# Altium PCB Smart_Restaurant.PcbDoc
Units mm, origin at the board's own origin, x right, y up, seen from the top; angles counter-clockwise.
Board outline 169.54 x 138.05 mm, 2 copper layers (Top Layer, Bottom Layer); 20 components, 32 nets, 110 pads, 0 vias.
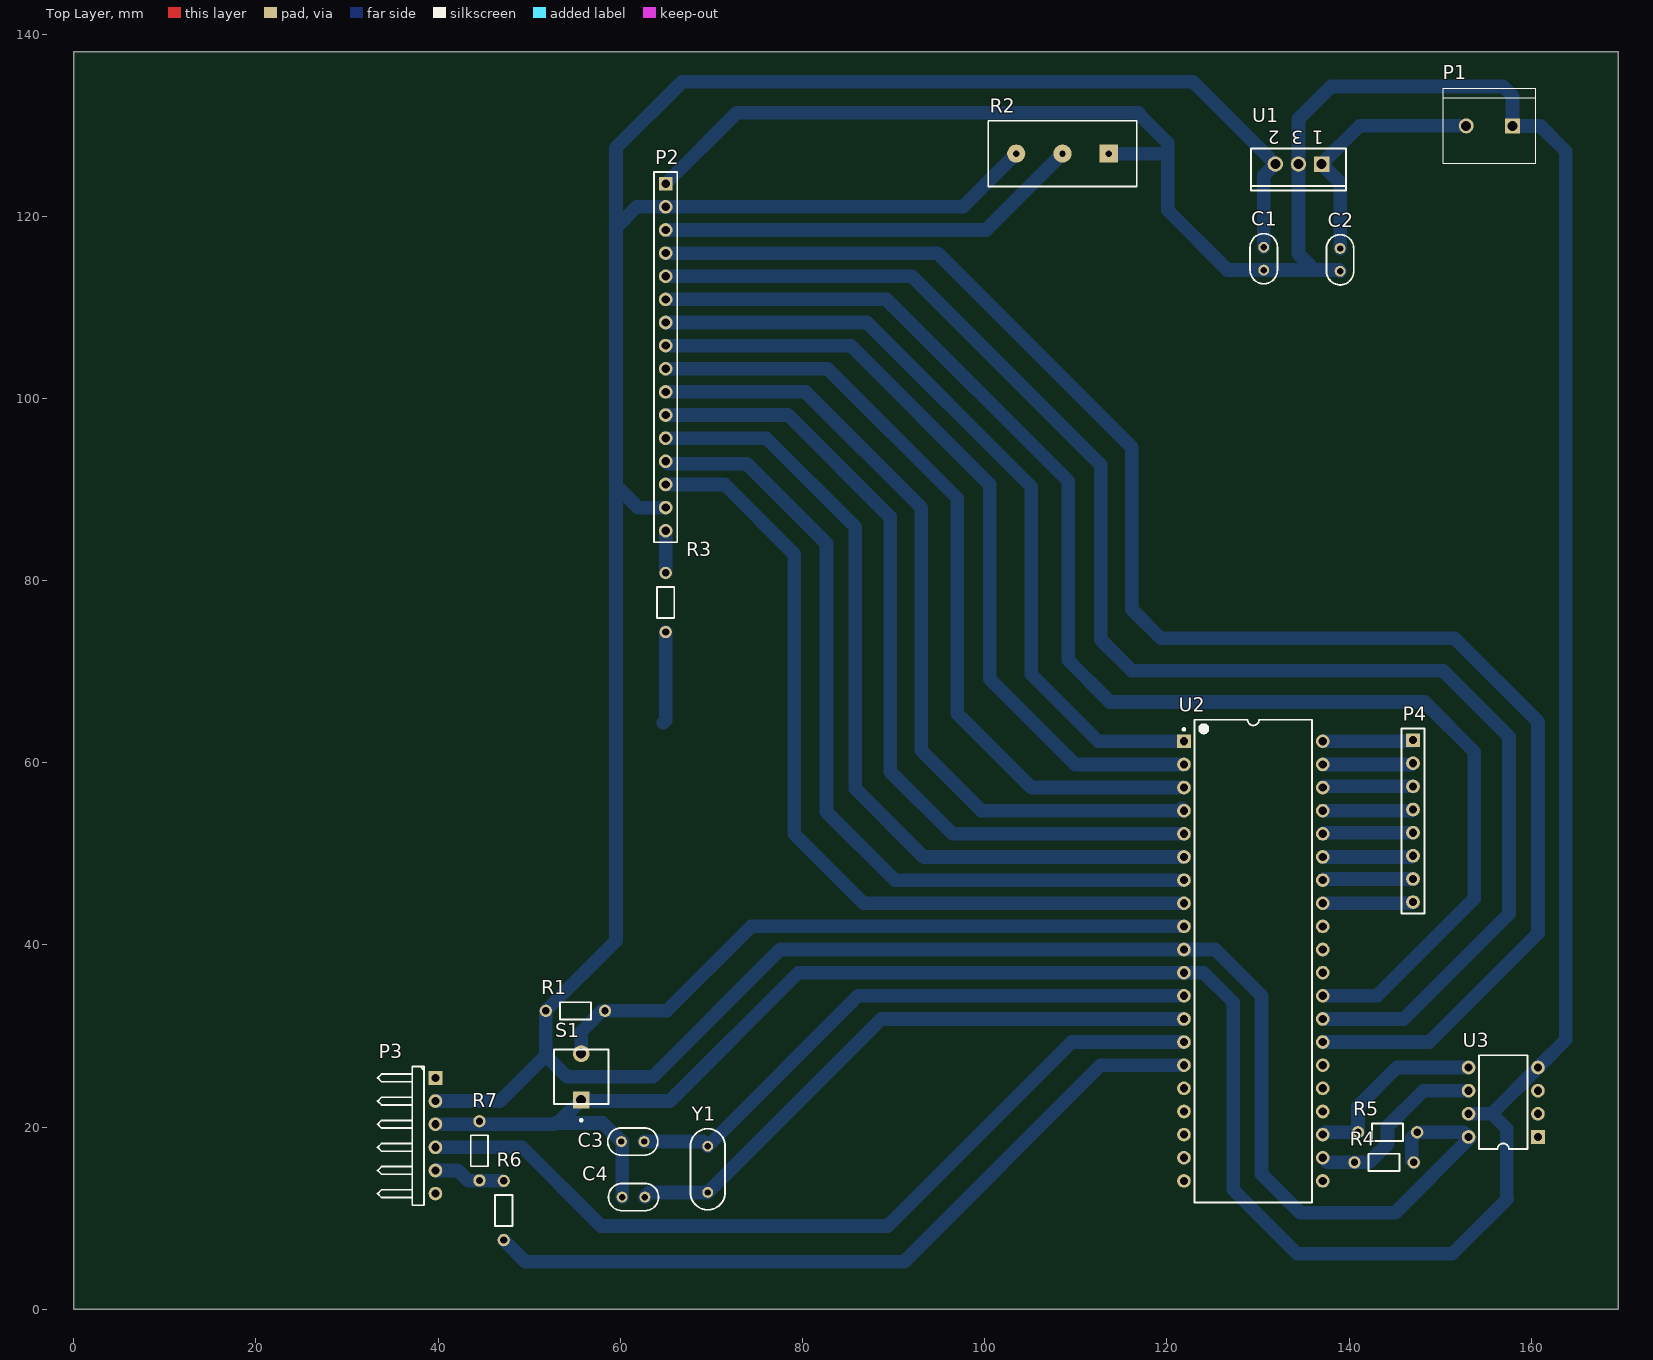
[diagram p0: Top Layer view]
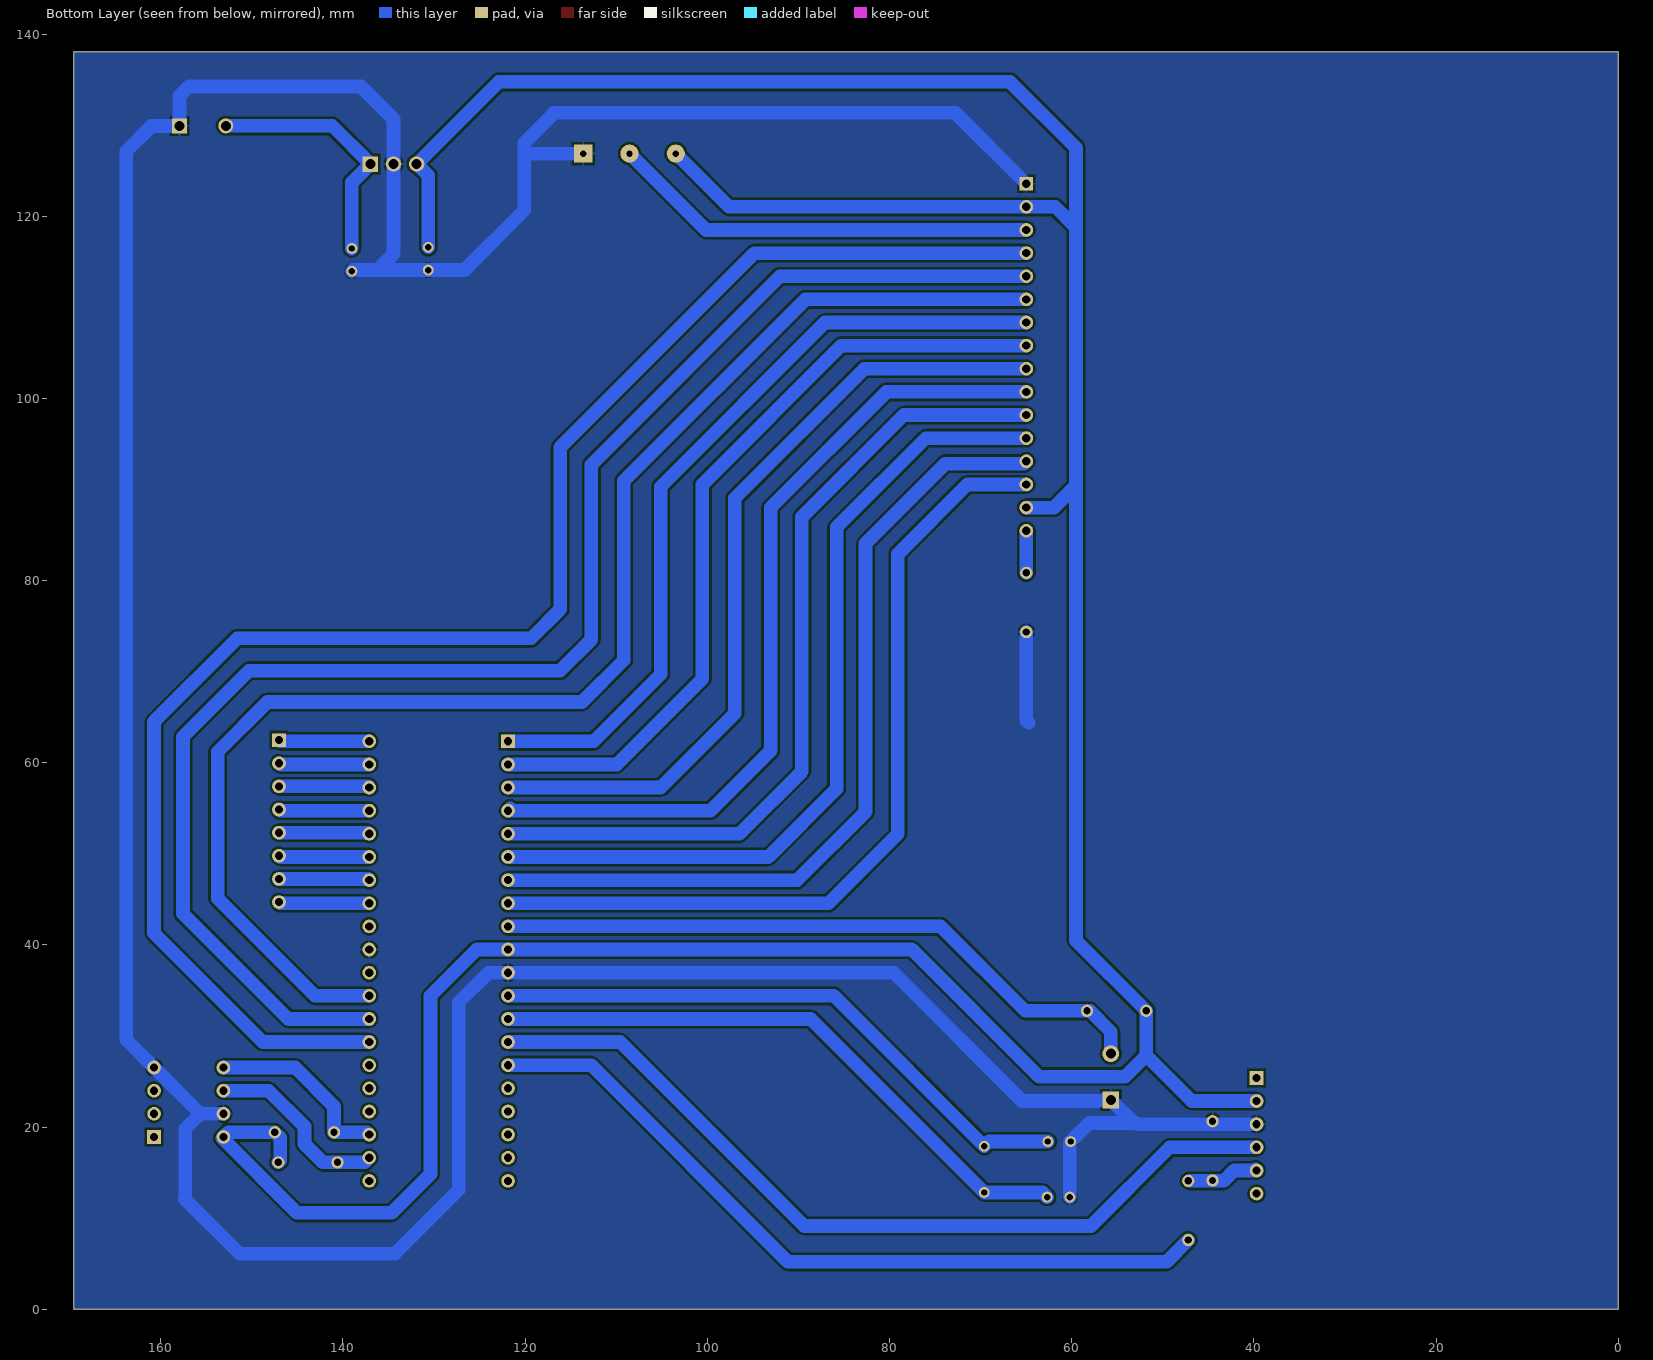
[diagram p1: Bottom Layer view, seen from below]

## Layer stack, top to bottom
Top Solder: solder mask 0.0102, Solder Resist, Dk 3.5
Top Layer: signal copper 0.0356
Dielectric 1: dielectric 0.32, FR-4, Dk 4.8
Bottom Layer: signal copper 0.0356
Bottom Solder: solder mask 0.0102, Solder Resist, Dk 3.5

## Board outline
0,0 169.545,0 169.545,138.049 0,138.049

## Design rules (kind name [scope] priority, off if disabled: settings)
Clearance [All] p1: gap=0.254 ignorepadtopadclearanceinfootprint=FALSE except(0: Arc-Hole Track-Hole SMDPad-Hole THPad-Hole Via-Hole Fill-Hole Poly-Hole Region-Hole Text-Hole; 0.508: Arc-Arc Arc-Track Track-Track)
PolygonConnect [All] p1: connectstyle=Relief reliefconductorwidth=0.254 reliefentries=4 polygonreliefangle="90 Angle" airgapwidth=0.254
RoutingLayers [All] p1: top layer_v5=FALSE bottom layer_v5=TRUE
RoutingTopology [All] p1: topology=Horizontal
RoutingVias [All] p1: holewidth=0.711 width=1.27 viastyle="Through Hole" minholewidth=0.711 minwidth=1.27 maxholewidth=0.711 maxwidth=1.27
SolderMaskExpansion [All] p1: expansion=0.102
Width [All] p1: maxlimit=2 minlimit=1.2 preferedwidth=1.5
28 further rules are at their usual default settings.

## Components (designator, comment, footprint, x,y, rotation, side; value= is the part's Value field where it differs from the comment)
C1 "Cap" CAPACITOR 130.635,114.086 r90 top value=0.1uF
C2 "Cap" CAPACITOR 139.017,113.959 r90 top value=0.33uF
C3 "Cap" CAPACITOR 60.111,18.415 r0 top value=22pF
C4 "Cap" CAPACITOR 60.198,12.319 r0 top value=22pF
P1 "282837-2" TE_282837-2 155.4,129.921 r180 top
P2 "Header 16" HDR1X16 64.976,123.571 r270 top
P3 "Header 6H" HDR1X6H 39.703,25.4 r270 top
P4 "Kepad" HDR1X8 147.018,62.484 r270 top
R1 "10K" RO3.2x1.7 55.07,32.766 r180 top
R2 "RPot" VR5 108.537,126.873 r180 top value=1K
R3 "330" RO3.2x1.7 64.976,77.597 r90 top
R4 "10K" RO3.2x1.7 143.843,16.129 r0 top
R5 "10K" RO3.2x1.7 144.224,19.431 r0 top
R6 "1K" RO3.2x1.7 47.196,10.847 r270 top
R7 "2K" RO3.2x1.7 44.529,17.399 r90 top
S1 "SW-PB" SPST-2 55.705,25.527 r90 top
U1 "L7805CV" TO220ABN 134.445,125.73 r180 top
U2 "ATmega16L-8PI" 40P6 129.492,38.227 r0 top
U3 "AT24C02-10PI-2.7" 8P3 156.924,22.733 r90 top
Y1 "XTAL" XTAL 69.596,17.907 r270 top

## Footprints (in the part's own frame and the unit in brackets; to place one, negate y for a bottom-side part, rotate by r counter-clockwise, add the part's x,y. Pads: shape width x height; smd on the part's side, far side on the other; paste and mask are expansions set on the pad)
8P3 [mm] "DIP; 8 Leads; Row Spacing 7.62 mm; Pitch 2.54 mm"
  rect 1.5x1.5 hole 0.9: 1(-3.81,-3.81)
  round 1.5 hole 0.9: 2(-1.27,-3.81) 3(1.27,-3.81) 4(3.81,-3.81) 5(3.81,3.81) 6(1.27,3.81) 7(-1.27,3.81) 8(-3.81,3.81)
  silkscreen extent -5.15,-2.65 5.15,2.65
40P6 [mm] "DIP, 40-Leads, Row Spacing 15.24mm, Pitch 2.54mm, Body 52.2x13.95mm"
  rect 1.5x1.5 hole 0.9: 1(-7.62,24.13)
  round 1.5 hole 0.9: 2(-7.62,21.59) 3(-7.62,19.05) 4(-7.62,16.51) 5(-7.62,13.97) 6(-7.62,11.43) 7(-7.62,8.89) 8(-7.62,6.35) 9(-7.62,3.81) 10(-7.62,1.27) 11(-7.62,-1.27) 12(-7.62,-3.81) 13(-7.62,-6.35) 14(-7.62,-8.89) 15(-7.62,-11.43) 16(-7.62,-13.97) 17(-7.62,-16.51) 18(-7.62,-19.05) 19(-7.62,-21.59) 20(-7.62,-24.13) 21(7.62,-24.13) 22(7.62,-21.59) 23(7.62,-19.05) 24(7.62,-16.51) 25(7.62,-13.97) 26(7.62,-11.43) 27(7.62,-8.89) 28(7.62,-6.35) 29(7.62,-3.81) 30(7.62,-1.27) 31(7.62,1.27) 32(7.62,3.81) 33(7.62,6.35) 34(7.62,8.89) 35(7.62,11.43) 36(7.62,13.97) 37(7.62,16.51) 38(7.62,19.05) 39(7.62,21.59) 40(7.62,24.13)
  silkscreen extent -7.74,-26.5 6.45,26.5, body extent -7.05,-26.47 7.05,26.47, height 4.83
CAPACITOR [mm]
  round 1.2 hole 0.7: 1(0,0) 2(2.5,0)
  silkscreen extent -1.5,-1.5 4,1.5
HDR1X6H [mm] "Connector; Header; 6 Position; Right Angle"
  rect 1.5x1.5 hole 0.9: 1(0,0)
  round 1.5 hole 0.9: 2(2.54,0) 3(5.08,0) 4(7.62,0) 5(10.16,0) 6(12.7,0)
  silkscreen extent -1.27,-6.35 13.97,-1.27
HDR1X8 [mm] "Connector; Header; 8 Position"
  rect 1.5x1.5 hole 0.9: 1(0,0)
  round 1.5 hole 0.9: 2(2.54,0) 3(5.08,0) 4(7.62,0) 5(10.16,0) 6(12.7,0) 7(15.24,0) 8(17.78,0)
  silkscreen extent -1.27,-1.27 19.05,1.27
HDR1X16 [mm] "Connector; Header; 16 Position"
  rect 1.5x1.5 hole 0.9: 1(0,0)
  round 1.5 hole 0.9: 2(2.54,0) 3(5.08,0) 4(7.62,0) 5(10.16,0) 6(12.7,0) 7(15.24,0) 8(17.78,0) 9(20.32,0) 10(22.86,0) 11(25.4,0) 12(27.94,0) 13(30.48,0) 14(33.02,0) 15(35.56,0) 16(38.1,0)
  silkscreen extent -1.27,-1.27 39.37,1.27
RO3.2x1.7 [mm] "Resistor, Axial; Body 3.4 x 1.9 mm (LxDia. max), Lead Dia. 0.5 mm (max)"
  round 1.35 hole 0.8: 1(-3.25,0) 2(3.25,0)
  silkscreen extent -1.7,-0.95 1.7,0.95
SPST-2 [mm] "Circuit Breaker; 2 Leads"
  rect 1.85x1.85 hole 1.1: 1(-2.54,0)
  round 1.85 hole 1.1: 2(2.54,0)
  silkscreen extent -4.89,-3 3,3
TE_282837-2 [mm]
  rect 1.65x1.65 hole 1.1: 1(-2.54,0)
  round 1.65 hole 1.1: 2(2.54,0)
  silkscreen extent -5.08,-4.1 5.08,4.1, body extent -5.68,0 5.08,8.2, height 7.25
TO220ABN [mm] "TO, Thru-Hole, Vertical, Heatsink Mounted; 3 In-Line Leads; Pitch 2.54 mm; Pin sequence 1, 3, 2"
  rect 1.7x1.7 hole 1.1: 1(-2.54,0)
  round 1.7 hole 1.1: 2(2.54,0) 3(0,0)
  silkscreen extent -5.2,-1.7 5.2,2.9
VR5 [mm] "Variable Resistor, Thru-Hole; 3 Leads"
  rect 2x2 hole 0.7: 1(-5.08,0)
  round 2 hole 0.7: 2(0,0) 3(5.08,0)
  silkscreen extent -8.15,-3.6 8.15,3.6
XTAL [mm]
  round 1.2 hole 0.7: 1(0,0) 2(5.08,0)
  silkscreen extent -1.91,-1.91 6.99,1.91

## Part data
C1 C2 C3 C4: "Capacitor", LatestRevisionDate=17-Jul-2002, LatestRevisionNote="Re-released for DXP Platform.", PackageReference=RAD-0.3, Published=8-Jun-2000, Publisher="Altium Limited"
P1: "Connector Terminal Blocks Receptacle 2 Position 5.08mm Solder Straight Thru-Hole 13.5A/Contact", Package=None, Availability=Good, Check_prices=https://www.snapeda.com/parts/282837-2/TE%20Connectivity%20AMP%20Connectors/view-part/2549980/?ref=eda, MF="TE Connectivity", MP=282837-2, Price=None, Purchase-URL=https://pricing.snapeda.com/search/part/282837-2/?ref=eda, SnapEDA_Link=https://www.snapeda.com/parts/282837-2/TE%20Connectivity%20AMP%20Connectors/view-part/2549980/?ref=snap
P2: "Header, 16-Pin", LatestRevisionDate=17-Jul-2002, LatestRevisionNote="Re-released for DXP Platform.", Publisher="Altium Limited"
P3: "Header, 6-Pin, Right Angle", LatestRevisionDate=17-Jul-2002, LatestRevisionNote="Re-released for DXP Platform.", Publisher="Altium Limited"
P4: library part "Header 8", "Header, 8-Pin", LatestRevisionDate=17-Jul-2002, LatestRevisionNote="Re-released for DXP Platform.", Publisher="Altium Limited"
R1 R3 R4 R5 R6 R7: library part EROS2C, "Metal Film Resistor, 2 Ohm to 1M Ohm Range, 0.5% and 1% Tolerance, 0.25 W", ComponentLink1Description="Manufacturer Link", ComponentLink1URL=http://www.panasonic.com/industrial/components/resistive_products.htm, ComponentLink2Description=Datasheet, ComponentLink2URL=http://www.panasonic.com/industrial/components/pdf/AOA0000CE14.pdf, ComponentLink3Description="Discontinuation Notice", ComponentLink3URL=http://www.panasonic.com/industrial/components/pdf/dc050.pdf, PackageReference=RO3.2x1.7, Published=17-Dec-2003, Publisher="Altium Limited"
R2: "Potentiometer", LatestRevisionDate=17-Jul-2002, LatestRevisionNote="Re-released for DXP Platform.", PackageReference=VR5, Published=8-Jun-2000, Publisher="Altium Limited", Set Position=0.5, Sim Note="Enter the Resistance value and the set point into parameter fields."
S1: "Switch", LatestRevisionDate=17-Jul-2002, LatestRevisionNote="Re-released for DXP Platform.", PackageReference=SPST-2, Published=24-Mar-1999, Publisher="Altium Limited"
U1: "Positive Voltage Regulator", ComponentLink1Description="Manufacturer Link", ComponentLink1URL=http://www.st.com/, DatasheetVersion=Dec-1998, LatestRevisionDate=17-Jul-2002, LatestRevisionNote="Re-released for DXP Platform.", Note="Tab is connected to pin 3 (GND).", PackageDescription="TO, Thru-Hole, Vertical, Heatsink Mounted; 3 In-Line Leads; Pitch 2.54 mm; Pin sequence 1, 3, 2", PackageReference=TO220ABN, PackageVersion=Jun-1998, Published=24-Aug-2001, Publisher="Altium Limited"
U2: "8-Bit AVR Microcontroller with 16K Bytes of In-System Programmable Flash Memory", Supplier Part Number 1=ATMEGA16L-8PI-ND, Code_JEDEC=MS-011-AC, ComponentLink1Description=Datasheet, ComponentLink1URL=http://www.atmel.com/dyn/resources/prod_documents/doc2466.pdf, ComponentLink2Description="Atmel.com Home", ComponentLink2URL=http://www.atmel.com, DatasheetVersion=2466E-AVR-10/02, PackageDescription="40-lead (0.600\"/15.24mm Wide) Plastic Dual Inline Package (PDIP)", PackageReference=40P6, PackageVersion="revB, Sep-2001", Published=17-Sep-2003, Publisher="Altium Limited", Supplier 1=Digi-Key, Supplier 2=Mouser, Supplier Part Number 2=556-ATMEGA16L-8PI
U3: "2-WIre Serial EEPROM-2K-Dip-Industerial -Vcc=2.7to5.5V", Manufacturer=Atmel, PART NO=AT24C02-10PI-2.7
Y1: "Crystal Oscillator", LatestRevisionDate=17-Jul-2002, LatestRevisionNote="Re-released for DXP Platform.", PackageDescription="Crystal, Thru-Hole; 2 Leads; Body 3.1 x 8.2 mm (Dia.xH)", PackageReference=R38, Published=8-Jun-2000, Publisher="Altium Limited"

## Nets (pads, with @x,y where several pads share a name; then routed paths per layer and width w, separated by ;. In a path a pad name is that pad's centre, name@x,y a point inside that pad or via, vN(x,y) a via of type N, cw(c..) or ccw(c..) an arc to the next point about the centre after c; other vN are vias at no path point)
+5: C1.2 P2.2 P2.15 P3.2 R1.2 R2.3 R4.2 R5.2 U1.2 U2.10 U3.8 | length 405
  Bottom Layer w1.5: P3.2 46.815,22.86 51.82,27.865 ; 59.515,91.186 59.515,40.461 R1.2 51.82,27.865 ; P2.15 61.928,88.011 59.515,90.424 59.515,118.745 ; R2.3 97.615,121.031 P2.2 61.801,121.031 59.515,118.745 ; C1.2 130.635,124.46 U1.2 122.888,134.747 66.754,134.747 59.515,127.508 59.515,118.745 ; R4.2 146.891,16.331 146.891,18.848 R5.2 152.606,19.431 153.241,18.796 145.034,10.589 134.651,10.589 130.381,14.859 130.381,34.417 125.301,39.497 U2.10 77.538,39.497 63.573,25.533 54.152,25.533 51.82,27.865
+9V: C2.2 P1.2 U1.1 | length 27.7
  Bottom Layer w1.5: C2.2 139.017,123.698 U1.1 141.176,129.921 P1.2
col1: P4.4 U2.37 | length 10
  Bottom Layer w1.5: U2.37 146.891,54.737 P4.4
col2: P4.3 U2.38 | length 10
  Bottom Layer w1.5: U2.38 137.239,57.404 P4.3
col3: P4.2 U2.39 | length 10
  Bottom Layer w1.5: U2.39 146.891,59.817 P4.2
col4: P4.1 U2.40 | length 10
  Bottom Layer w1.5: U2.40 146.891,62.357 P4.1
D0: P2.7 U2.1 | length 88
  Bottom Layer w1.5: P2.7 87.074,108.331 105.108,90.297 105.108,69.723 112.474,62.357 U2.1
D1: P2.8 U2.2 | length 88.4
  Bottom Layer w1.5: P2.8 85.296,105.791 100.536,90.551 100.536,69.215 109.934,59.817 U2.2
D2: P2.9 U2.3 | length 89.8
  Bottom Layer w1.5: P2.9 82.756,103.251 96.98,89.027 96.98,65.405 105.108,57.277 U2.3
D3: P2.10 U2.4 | length 91.9
  Bottom Layer w1.5: P2.10 80.343,100.711 93.043,88.011 93.043,61.341 99.647,54.737 U2.4 U2.4@121.618,54.991
D4: P2.11 U2.5 | length 92.3
  Bottom Layer w1.5: P2.11 78.438,98.171 89.614,86.995 89.614,59.055 96.472,52.197 U2.5
D5: P2.12 U2.6 | length 92.8
  Bottom Layer w1.5: P2.12 76.025,95.631 85.804,85.852 85.804,57.15 93.297,49.657 U2.6
D6: P2.13 U2.7 | length 93.2
  Bottom Layer w1.5: P2.13 65.23,92.837 73.866,92.837 82.629,84.074 82.629,54.61 90.122,47.117 U2.7
D7: P2.14 U2.8 | length 93.9
  Bottom Layer w1.5: P2.14 71.453,90.551 79.073,82.931 79.073,52.197 86.693,44.577 U2.8
E: P2.6 U2.29 | length 158.1
  Bottom Layer w1.5: P2.6 89.233,110.871 109.172,90.932 109.172,71.247 113.744,66.675 148.288,66.675 153.749,61.214 153.749,45.085 143.081,34.417 U2.29
GND: C1.1 C2.1 C3.1 C4.1 P1.1 P2.1 P3.3 R2.1 R3.1 R7.2 S1.1 U1.3 U2.11 U2.31 U3.4 U3.7 | length 444.8
  Bottom Layer w1.5: P3.3 52.784,20.32 ; 52.911,20.447 58.079,20.447 C3.1 ; 53.165,20.447 S1.1 S1.1@56.467,22.987 ; 57.09,22.86 65.436,22.86 79.533,36.957 U2.11 124.031,36.957 127.279,33.709 127.279,13.135 134.318,6.096 151.336,6.096 157.383,12.143 ; C4.1 C3.1@60.198,18.415 ; 64.722,64.389 64.976,64.643 R3.1 ; P2.1 72.748,131.343 116.919,131.343 116.919,131.216 120.094,128.041 120.094,126.873 ; R2.1 120.094,126.873 ; C2.1 138.89,114.086 135.778,114.086 ; U3.7 155.654,21.463 ; 157.305,12.22 157.305,19.812 155.654,21.463 ; 120.094,126.873 120.094,120.65 126.658,114.086 C1.1 135.778,114.086 ; 135.778,114.086 135.778,114.53 134.445,115.864 U1.3 134.445,130.683 138.001,134.239 156.924,134.239 157.94,133.223 P1.1 157.967,129.894 161.015,129.894 163.782,127.127 163.782,74.521 163.782,34.925 163.782,29.591 U3.4 155.654,21.463
NetC3_2: C3.2 U2.12 Y1.1 | length 66.3
  Bottom Layer w1.5: C3.2 69.088,18.415 Y1.1 86.106,34.417 U2.12
NetC4_2: C4.2 U2.13 Y1.2 | length 67.3
  Bottom Layer w1.5: C4.2 63.206,12.827 Y1.2 88.646,31.877 U2.13
NetP2_3: P2.3 R2.2 | length 47
  Bottom Layer w1.5: P2.3 100.155,118.491 R2.2
NetP2_16: P2.16 R3.2 | length 4.6
  Bottom Layer w1.5: R3.2 P2.16
NetP3_5: P3.5 R6.1 R7.1 | length 8
  Bottom Layer w1.5: P3.5@39.83,15.367 P3.5 42.168,15.24 43.311,14.097 R6.1@47.069,14.097
reset: R1.1 S1.2 U2.9 | length 73.4
  Bottom Layer w1.5: S1.2 55.705,30.48 57.991,32.766 R1.1 65.103,32.766 74.374,42.037 U2.9
row1: P4.8 U2.33 | length 10
  Bottom Layer w1.5: U2.33 146.891,44.577 P4.8
row2: P4.7 U2.34 | length 10
  Bottom Layer w1.5: U2.34 137.239,47.244 P4.7
row3: P4.6 U2.35 | length 10
  Bottom Layer w1.5: U2.35 146.891,49.657 P4.6
row4: P4.5 U2.36 | length 10
  Bottom Layer w1.5: U2.36 137.239,52.324 P4.5
RS: P2.4 U2.27 | length 179.3
  Bottom Layer w1.5: P2.4 94.821,115.951 116.157,94.615 116.157,76.835 119.332,73.66 151.59,73.66 160.734,64.516 160.734,41.275 148.796,29.337 U2.27
RW: P2.5 U2.28 | length 169.4
  Bottom Layer w1.5: P2.5 92.027,113.411 112.728,92.71 112.728,73.533 116.157,70.104 150.32,70.104 157.559,62.865 157.559,43.434 146.002,31.877 U2.28
RXD: P3.4 U2.14 | length 94.1
  Bottom Layer w1.5: P3.4 49.228,17.78 57.864,9.144 89.36,9.144 109.553,29.337 U2.14
SCL: R4.1 U2.22 U3.6 | length 20.6
  Bottom Layer w1.5: U2.22 137.62,16.129 R4.1 142.192,16.129 144.224,18.161 144.224,20.066 148.161,24.003 U3.6
SDA: R5.1 U2.23 U3.5 | length 20.7
  Bottom Layer w1.5: U2.23 137.366,19.431 R5.1 140.974,22.277 145.24,26.543 U3.5
TXD: R6.2 U2.15 | length 84.6
  Bottom Layer w1.5: R6.2 49.586,5.207 54.256,5.207 91.138,5.207 112.728,26.797 U2.15
pads on no net: P3.1 P3.6 U2.16 U2.17 U2.18 U2.19 U2.20 U2.21 U2.24 U2.25 U2.26 U2.30 U2.32 U3.1 U3.2 U3.3

## Polygon pours and split planes (outlines as drawn)
GND on Bottom Layer "Top Layer-No Net" (solid, remove dead copper, pour order 0): 0,0 169.545,0 169.545,138.049 0,138.049

## Text inside footprints (layer, text, board x,y; h text height)
U1: Top Overlay "1" at 137.235,129.405 h1.5 r180; Top Overlay "2" at 132.405,129.405 h1.5 r180; Top Overlay "3" at 134.945,129.405 h1.5 r180